# EAGLE board testH (EAGLE 6.1)
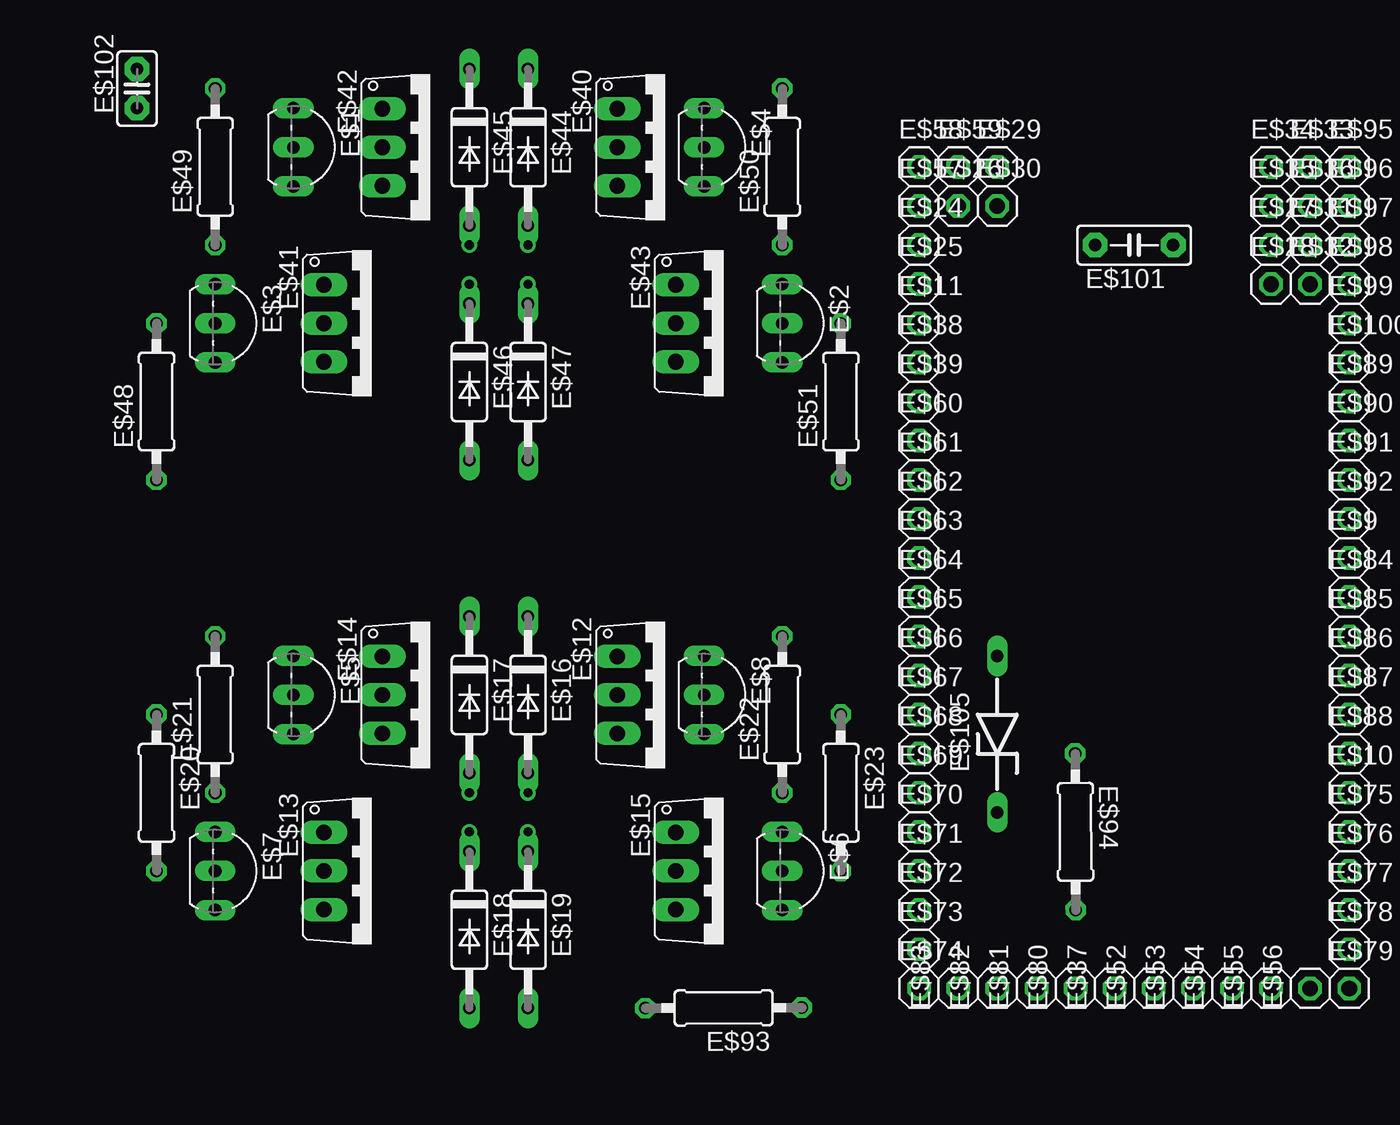
[diagram p0: board, top side]
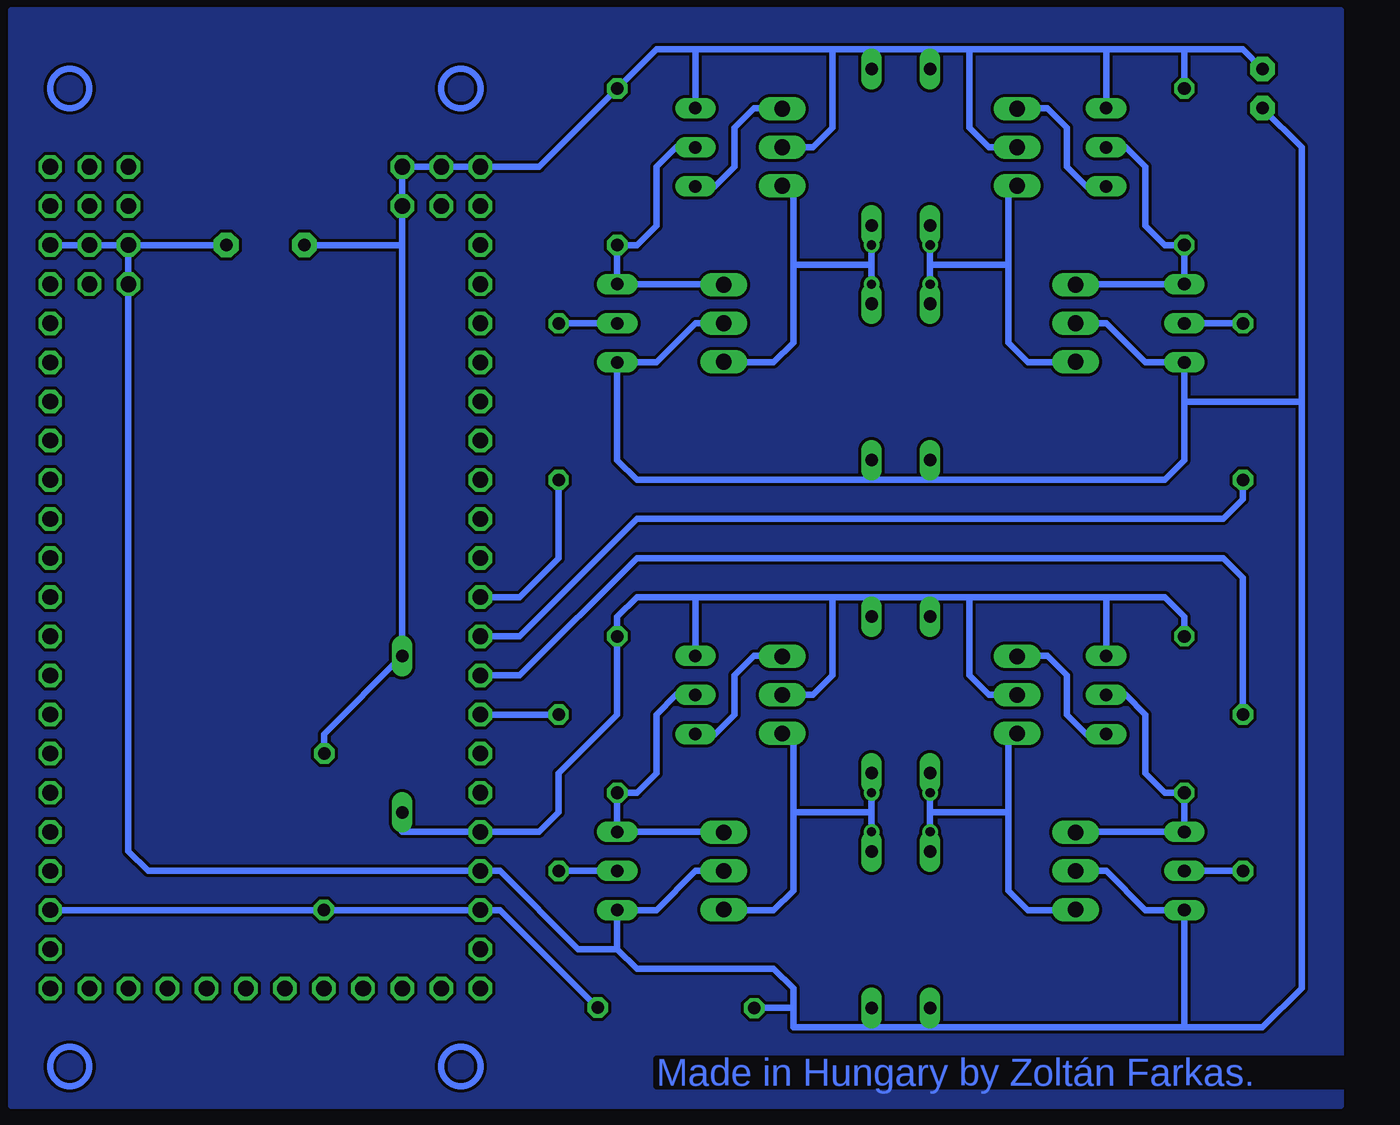
[diagram p1: board, bottom side, seen from below]

No outline drawn. Coordinates in mm, seen from the top.
Copper layers (1*16): Top 0.035mm / dielectric 1.5mm / Bottom 0.035mm
Design rules: minimum track width 10mil, minimum drill 24mil, track to track 8mil, track to pad 8mil, pad to pad 8mil, via to via 8mil, smd to smd 8mil, copper to edge 40mil, drill to drill 8mil, minimum pad ring 10mil, minimum via ring 8mil, stop-mask expansion 4mil, vias tented up to drill 0mil, thermal gap 10mil

## Footprints (pad centres in the part's own frame; a part is rotated, then mirrored left to right if it is on the bottom)
TO92-CBE = drill 0.813 long: B 0,0; C -2.54,0; E 2.54,0
1X01 = drill 1.016 octagon: 1 0,0
T-30_V = drill 1.016 long: 1 -2.5,-3.1; 2 0,-3.1; 3 2.5,-3.1
C2992 = drill 0.813 long: A 5.08,0; C -5.08,0
0207/10 = drill 0.813 octagon: 1 -5.08,0; 2 5.08,0
C5B2.5 = drill 0.813 pad 1.6 octagon: 1 -2.54,0; 2 2.54,0
C2.5-2 = drill 0.813 pad 1.6 octagon: 1 -1.27,0; 2 1.27,0
ZDIO-10 = drill 0.813 long: A 5.08,0; C -5.08,0

## Placement (x,y rotation side)
E$1  [TO92-CBE]  43.18,93.98 270 top
E$2  [TO92-CBE]  74.93,82.55 270 top
E$3  [TO92-CBE]  38.1,82.55 270 top
E$4  [TO92-CBE]  69.85,93.98 270 top
E$5  [TO92-CBE]  43.18,58.42 270 top
E$6  [TO92-CBE]  74.93,46.99 270 top
E$7  [TO92-CBE]  38.1,46.99 270 top
E$8  [TO92-CBE]  69.85,58.42 270 top
E$9  [1X01]  111.76,67.31 0 top
E$10  [1X01]  111.76,52.07 0 top
E$11  [1X01]  83.82,82.55 0 top
E$12  [T-30_V]  67.31,58.42 270 top
E$13  [T-30_V]  48.26,46.99 270 top
E$14  [T-30_V]  52.07,58.42 270 top
E$15  [T-30_V]  71.12,46.99 270 top
E$16  [C2992]  58.42,58.42 270 top
E$17  [C2992]  54.61,58.42 270 top
E$18  [C2992]  54.61,43.18 270 top
E$19  [C2992]  58.42,43.18 270 top
E$20  [0207/10]  34.29,52.07 270 top
E$21  [0207/10]  38.1,57.15 90 top
E$22  [0207/10]  74.93,57.15 90 top
E$23  [0207/10]  78.74,52.07 270 top
E$24  [1X01]  83.82,87.63 0 top
E$25  [1X01]  83.82,85.09 0 top
E$26  [1X01]  86.36,90.17 0 top
E$27  [1X01]  106.68,87.63 0 top
E$28  [1X01]  106.68,85.09 0 top
E$29  [1X01]  88.9,92.71 0 top
E$30  [1X01]  88.9,90.17 0 top
E$31  [1X01]  109.22,87.63 0 top
E$32  [1X01]  109.22,85.09 0 top
E$33  [1X01]  109.22,92.71 0 top
E$34  [1X01]  106.68,92.71 0 top
E$35  [1X01]  106.68,90.17 0 top
E$36  [1X01]  109.22,90.17 0 top
E$37  [1X01]  96.52,39.37 90 top
E$38  [1X01]  83.82,80.01 0 top
E$39  [1X01]  83.82,77.47 0 top
E$40  [T-30_V]  67.31,93.98 270 top
E$41  [T-30_V]  48.26,82.55 270 top
E$42  [T-30_V]  52.07,93.98 270 top
E$43  [T-30_V]  71.12,82.55 270 top
E$44  [C2992]  58.42,93.98 270 top
E$45  [C2992]  54.61,93.98 270 top
E$46  [C2992]  54.61,78.74 270 top
E$47  [C2992]  58.42,78.74 270 top
E$48  [0207/10]  34.29,77.47 90 top
E$49  [0207/10]  38.1,92.71 90 top
E$50  [0207/10]  74.93,92.71 90 top
E$51  [0207/10]  78.74,77.47 90 top
E$52  [1X01]  99.06,39.37 90 top
E$53  [1X01]  101.6,39.37 90 top
E$54  [1X01]  104.14,39.37 90 top
E$55  [1X01]  106.68,39.37 90 top
E$56  [1X01]  109.22,39.37 90 top
E$57  [1X01]  83.82,90.17 0 top
E$58  [1X01]  83.82,92.71 0 top
E$59  [1X01]  86.36,92.71 0 top
E$60  [1X01]  83.82,74.93 0 top
E$61  [1X01]  83.82,72.39 0 top
E$62  [1X01]  83.82,69.85 0 top
E$63  [1X01]  83.82,67.31 0 top
E$64  [1X01]  83.82,64.77 0 top
E$65  [1X01]  83.82,62.23 0 top
E$66  [1X01]  83.82,59.69 0 top
E$67  [1X01]  83.82,57.15 0 top
E$68  [1X01]  83.82,54.61 0 top
E$69  [1X01]  83.82,52.07 0 top
E$70  [1X01]  83.82,49.53 0 top
E$71  [1X01]  83.82,46.99 0 top
E$72  [1X01]  83.82,44.45 0 top
E$73  [1X01]  83.82,41.91 0 top
E$74  [1X01]  83.82,39.37 0 top
E$75  [1X01]  111.76,49.53 0 top
E$76  [1X01]  111.76,46.99 0 top
E$77  [1X01]  111.76,44.45 0 top
E$78  [1X01]  111.76,41.91 0 top
E$79  [1X01]  111.76,39.37 0 top
E$80  [1X01]  93.98,39.37 90 top
E$81  [1X01]  91.44,39.37 90 top
E$82  [1X01]  88.9,39.37 90 top
E$83  [1X01]  86.36,39.37 90 top
E$84  [1X01]  111.76,64.77 0 top
E$85  [1X01]  111.76,62.23 0 top
E$86  [1X01]  111.76,59.69 0 top
E$87  [1X01]  111.76,57.15 0 top
E$88  [1X01]  111.76,54.61 0 top
E$89  [1X01]  111.76,77.47 0 top
E$90  [1X01]  111.76,74.93 0 top
E$91  [1X01]  111.76,72.39 0 top
E$92  [1X01]  111.76,69.85 0 top
E$93  [0207/10]  71.12,38.1 180.2 top
E$94  [0207/10]  93.98,49.53 270.2 top
E$95  [1X01]  111.76,92.71 0 top
E$96  [1X01]  111.76,90.17 0 top
E$97  [1X01]  111.76,87.63 0 top
E$98  [1X01]  111.76,85.09 0 top
E$99  [1X01]  111.76,82.55 0 top
E$100  [1X01]  111.76,80.01 0 top
E$101  [C5B2.5]  97.79,87.63 180 top
E$102  [C2.5-2]  33.02,97.79 90 top
E$105  [ZDIO-10]  88.9,55.88 90 top

## Library data of the parts
E$1-E$8 E$12-E$15 E$40-E$43 = transistor
E$9-E$11 E$24-E$39 E$52-E$92 E$95-E$100 = pinhead
E$16-E$19 E$44-E$47 E$105 = diode
E$20-E$23 E$48-E$51 E$93 E$94 = resistor
E$101 E$102 = capacitor-wima

## Nets
S$2: E$2.C E$4.B E$50.1
S$4: E$4.E
S$5: E$3.B E$48.2
S$6: E$2.B E$51.2
S$7: E$5.B E$7.C E$21.1
S$8: E$45.A E$46.C
S$9: E$1.B E$3.C E$49.1
S$10: E$1.E
S$11: E$5.E
S$12: E$17.A E$18.C
S$14: E$8.E
S$15: E$23.1 E$67.1
S$16: E$6.C E$8.B E$22.1
S$17: E$6.B E$23.2
S$18: E$1.C E$4.C E$29.1 E$44.C E$45.C E$49.2 E$50.2 E$58.1 E$59.1 E$101.2 E$102.2
S$19: E$16.A E$19.C
S$20: E$51.1 E$64.1
S$21: E$7.B E$20.2
S$22: E$44.A E$47.C
S$23: E$48.1 E$65.1
S$26: E$77.1
S$28: E$5.C E$8.C E$16.C E$17.C E$21.2 E$22.2 E$70.1 E$105.C
S$29: E$2.E E$3.E E$6.E E$7.E E$18.A E$19.A E$46.A E$47.A E$71.1 E$97.1 E$101.1 E$102.1
S$36: E$20.1 E$66.1

## Tracks (layer width: path | path; a pad name or v marks a point on that pad's centre or on a via)
S$1
  Bottom 0.406: 49.53,55.88 49.53,50.8 | 49.53,50.8 49.53,45.72 48.26,44.45 45.72,44.45 | 54.61,50.8 49.53,50.8
S$2
  Bottom 0.406: E$4.B 71.12,93.98 72.39,92.71 72.39,88.9 73.66,87.63 E$50.1 E$2.C 68.58,85.09
S$3
  Bottom 0.406: 63.5,50.8 63.5,45.72 64.77,44.45 67.31,44.45 | 63.5,50.8 63.5,55.88 | 58.42,50.8 63.5,50.8
S$4
  Bottom 0.406: 64.77,96.52 66.04,96.52 67.31,95.25 67.31,92.71 68.58,91.44 E$4.E
S$5
  Bottom 0.406: E$3.B E$48.2
S$6
  Bottom 0.406: E$2.B E$51.2
S$7
  Bottom 0.406: E$5.B 41.91,58.42 40.64,57.15 40.64,53.34 39.37,52.07 E$21.1 E$7.C 44.45,49.53
S$8  (via drill 0.6)
  Bottom 0.406: E$45.A v54.61,87.63 v54.61,85.09 E$46.C
S$9
  Bottom 0.406: E$1.B 41.91,93.98 40.64,92.71 40.64,88.9 39.37,87.63 E$49.1 E$3.C 44.45,85.09
S$10
  Bottom 0.406: 48.26,96.52 46.99,96.52 45.72,95.25 45.72,92.71 44.45,91.44 E$1.E
S$11
  Bottom 0.406: 48.26,60.96 46.99,60.96 45.72,59.69 45.72,57.15 44.45,55.88 E$5.E
S$12  (via drill 0.6)
  Bottom 0.406: v54.61,49.53 E$18.C v54.61,52.07 E$17.A
S$13
  Bottom 0.406: 63.5,86.36 63.5,81.28 64.77,80.01 67.31,80.01 | 63.5,86.36 63.5,91.44 | 58.42,86.36 63.5,86.36
S$14
  Bottom 0.406: 64.77,60.96 66.04,60.96 67.31,59.69 67.31,57.15 68.58,55.88 E$8.E
S$15
  Bottom 0.406: E$23.1 E$67.1
S$16
  Bottom 0.406: E$8.B 71.12,58.42 72.39,57.15 72.39,53.34 73.66,52.07 E$22.1 E$6.C 68.58,49.53
S$17
  Bottom 0.406: E$6.B E$23.2
S$18
  Bottom 0.406: 88.9,87.63 E$29.1 E$59.1 E$58.1 80.01,92.71 E$50.2 72.39,100.33 69.85,100.33 | E$101.2 88.9,87.63 | 88.9,87.63 88.9,60.96 93.98,55.88 93.98,54.61 | E$4.C 69.85,100.33 | 60.96,100.33 60.96,95.25 62.23,93.98 63.5,93.98 | 49.53,93.98 50.8,93.98 52.07,95.25 52.07,100.33 | 52.07,100.33 54.61,100.33 | 54.61,100.33 58.42,100.33 | 58.42,100.33 60.96,100.33 | 60.96,100.33 69.85,100.33 | E$45.C 54.61,100.33 | E$44.C 58.42,100.33 | E$1.C 43.18,100.33 | 38.1,100.33 43.18,100.33 | E$49.2 38.1,100.33 | 38.1,100.33 34.29,100.33 E$102.2 | 52.07,100.33 43.18,100.33
S$19  (via drill 0.6)
  Bottom 0.406: E$16.A v58.42,52.07 v58.42,49.53 E$19.C
S$20
  Bottom 0.406: E$51.1 78.74,67.31 81.28,64.77 E$64.1
S$21
  Bottom 0.406: E$7.B E$20.2
S$22  (via drill 0.6)
  Bottom 0.406: E$44.A v58.42,87.63 v58.42,85.09 E$47.C
S$23
  Bottom 0.406: E$48.1 34.29,71.12 35.56,69.85 73.66,69.85 81.28,62.23 E$65.1
S$24
  pour Bottom: 114.3,31.75 27.94,31.75 27.94,102.87 114.3,102.87
S$26
  Bottom 0.406: E$77.1 82.55,44.45 76.2,38.1
S$27
  Bottom 0.406: 49.53,91.44 49.53,86.36 | 49.53,86.36 49.53,81.28 48.26,80.01 45.72,80.01 | 54.61,86.36 49.53,86.36
S$28
  Bottom 0.406: 43.18,64.77 39.37,64.77 38.1,63.5 E$21.2 | 43.18,64.77 52.07,64.77 | 52.07,64.77 54.61,64.77 | 54.61,64.77 58.42,64.77 | 58.42,64.77 60.96,64.77 | 60.96,64.77 69.85,64.77 | 69.85,64.77 73.66,64.77 74.93,63.5 E$22.2 74.93,57.15 78.74,53.34 78.74,50.8 80.01,49.53 E$70.1 88.9,49.53 E$105.C | 63.5,58.42 62.23,58.42 60.96,59.69 60.96,64.77 | E$8.C 69.85,64.77 | 49.53,58.42 50.8,58.42 52.07,59.69 52.07,64.77 | E$5.C 43.18,64.77 | E$17.C 54.61,64.77 | E$16.C 58.42,64.77
S$29
  Bottom 0.406: E$97.1 106.68,87.63 | 106.68,87.63 E$101.1 | 106.68,87.63 106.68,48.26 105.41,46.99 E$71.1 82.55,46.99 77.47,41.91 74.93,41.91 | 68.58,82.55 69.85,82.55 72.39,80.01 E$2.E 74.93,73.66 73.66,72.39 58.42,72.39 | E$47.A 58.42,72.39 | 54.61,72.39 58.42,72.39 | E$46.A 54.61,72.39 | 44.45,82.55 43.18,82.55 40.64,80.01 E$3.E 38.1,77.47 | 54.61,72.39 39.37,72.39 38.1,73.66 38.1,77.47 | E$102.1 30.48,93.98 30.48,77.47 | 38.1,77.47 30.48,77.47 | 30.48,77.47 30.48,39.37 33.02,36.83 38.1,36.83 | 68.58,46.99 69.85,46.99 72.39,44.45 E$6.E 74.93,41.91 | 44.45,46.99 43.18,46.99 40.64,44.45 E$7.E 38.1,36.83 | 63.5,38.1 63.5,39.37 64.77,40.64 73.66,40.64 74.93,41.91 | 63.5,38.1 63.5,36.83 58.42,36.83 | 58.42,36.83 54.61,36.83 | 54.61,36.83 38.1,36.83 | 54.61,36.83 E$18.A | 58.42,36.83 E$19.A | 66.04,38.1 63.5,38.1
S$36
  Bottom 0.406: E$20.1 34.29,66.04 35.56,67.31 73.66,67.31 81.28,59.69 E$66.1
(copper drawn outside any net)
  shapes: Bottom circle x4

## Text on the board
Bottom: Made in Hungary by Zoltán Farkas.